# Altium PCB Audio_Amplifier.PcbDoc
Units mm, origin at the board's own origin, x right, y up, seen from the top; angles counter-clockwise.
Board outline 81.9 x 78.4 mm, 2 copper layers (Top Layer, Bottom Layer), stack 1.671 mm thick; 10 components, 10 nets, 31 pads, 0 vias.
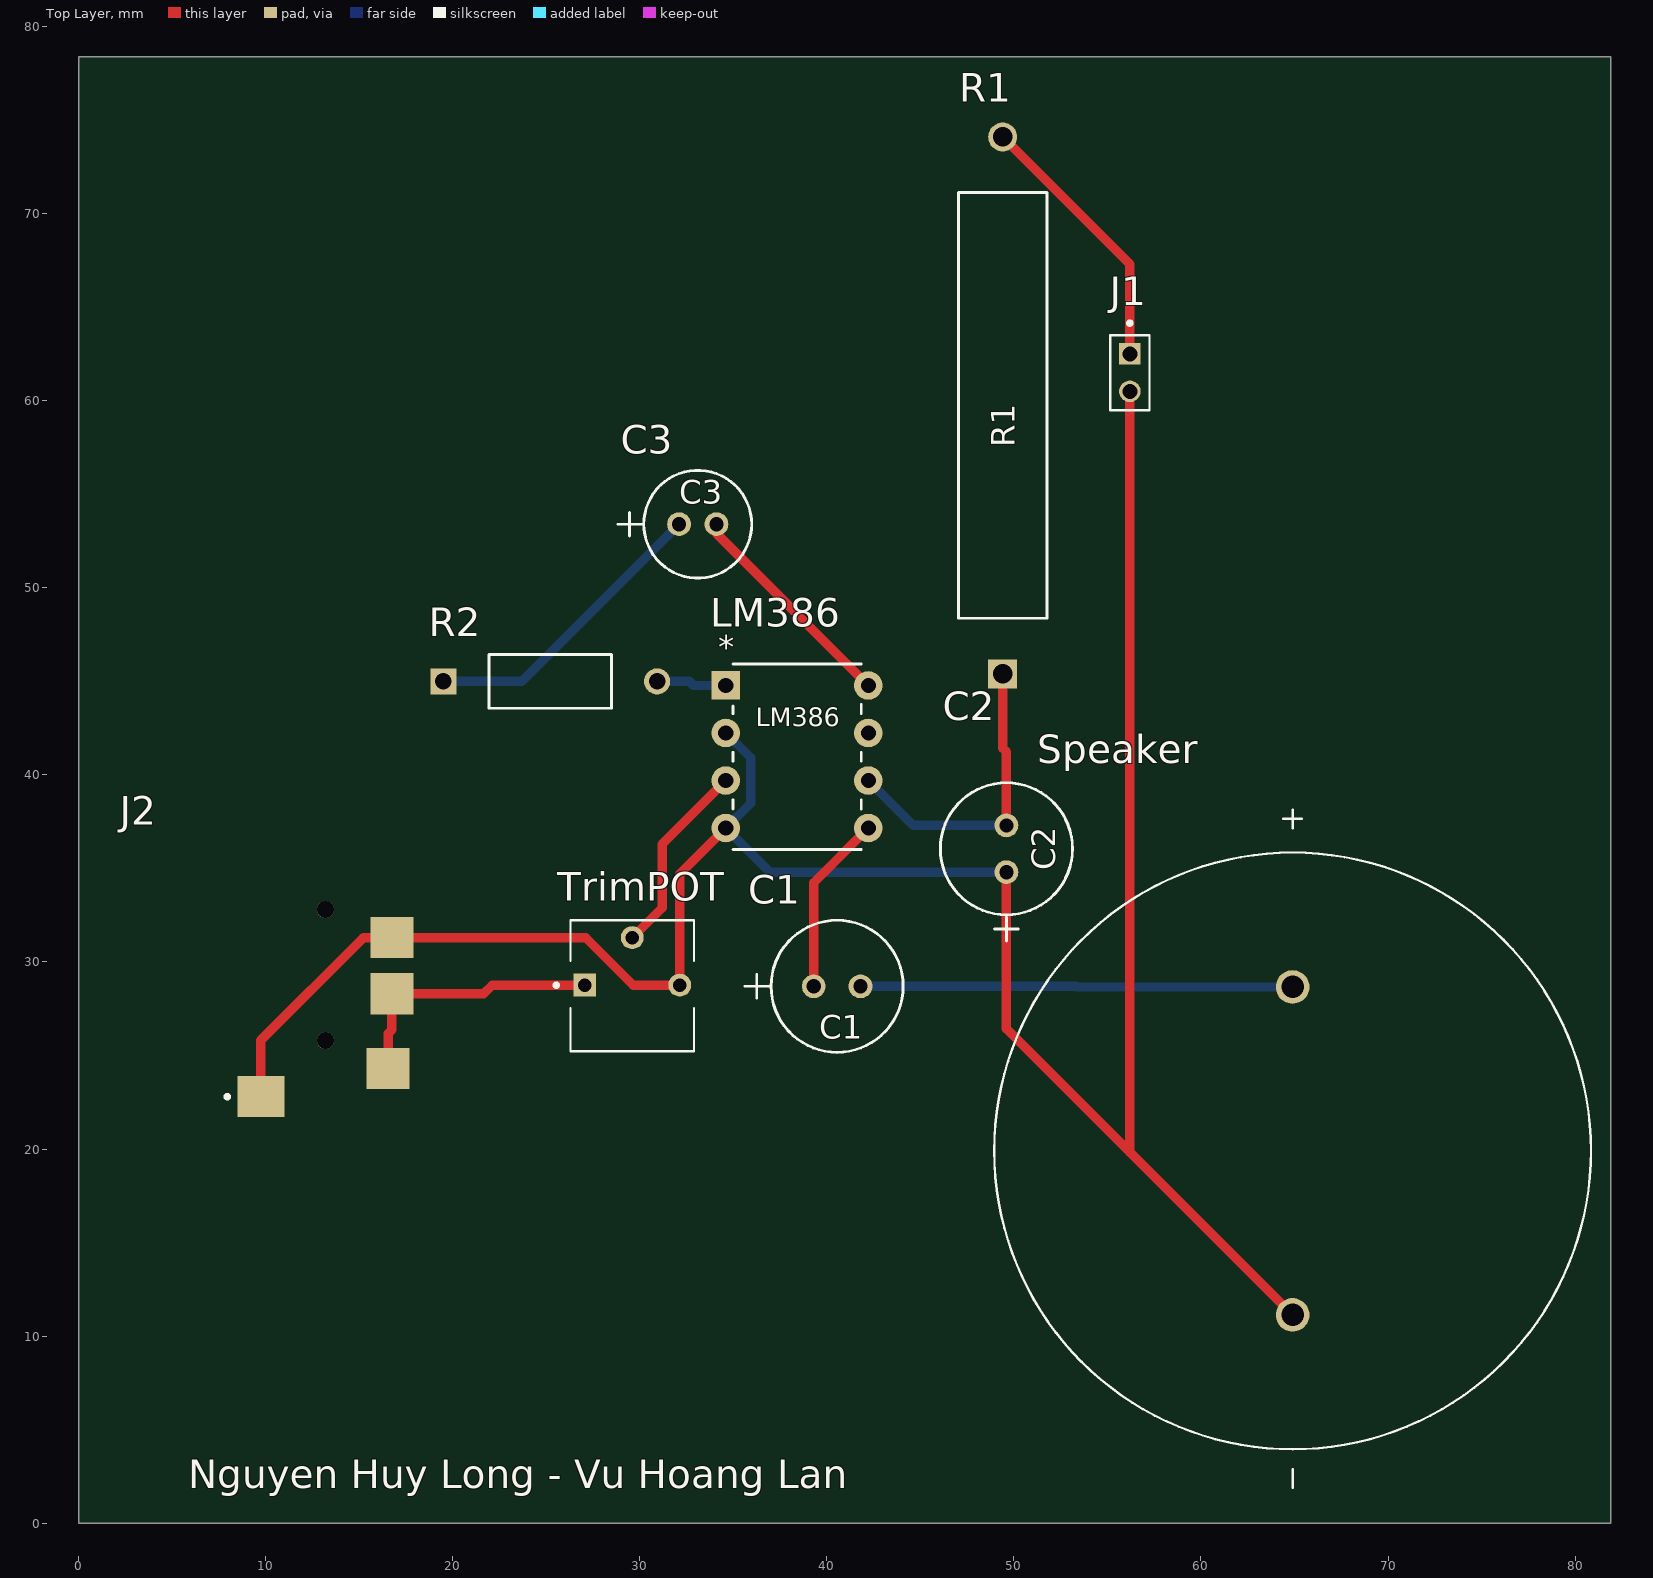
[diagram p0: Top Layer view]
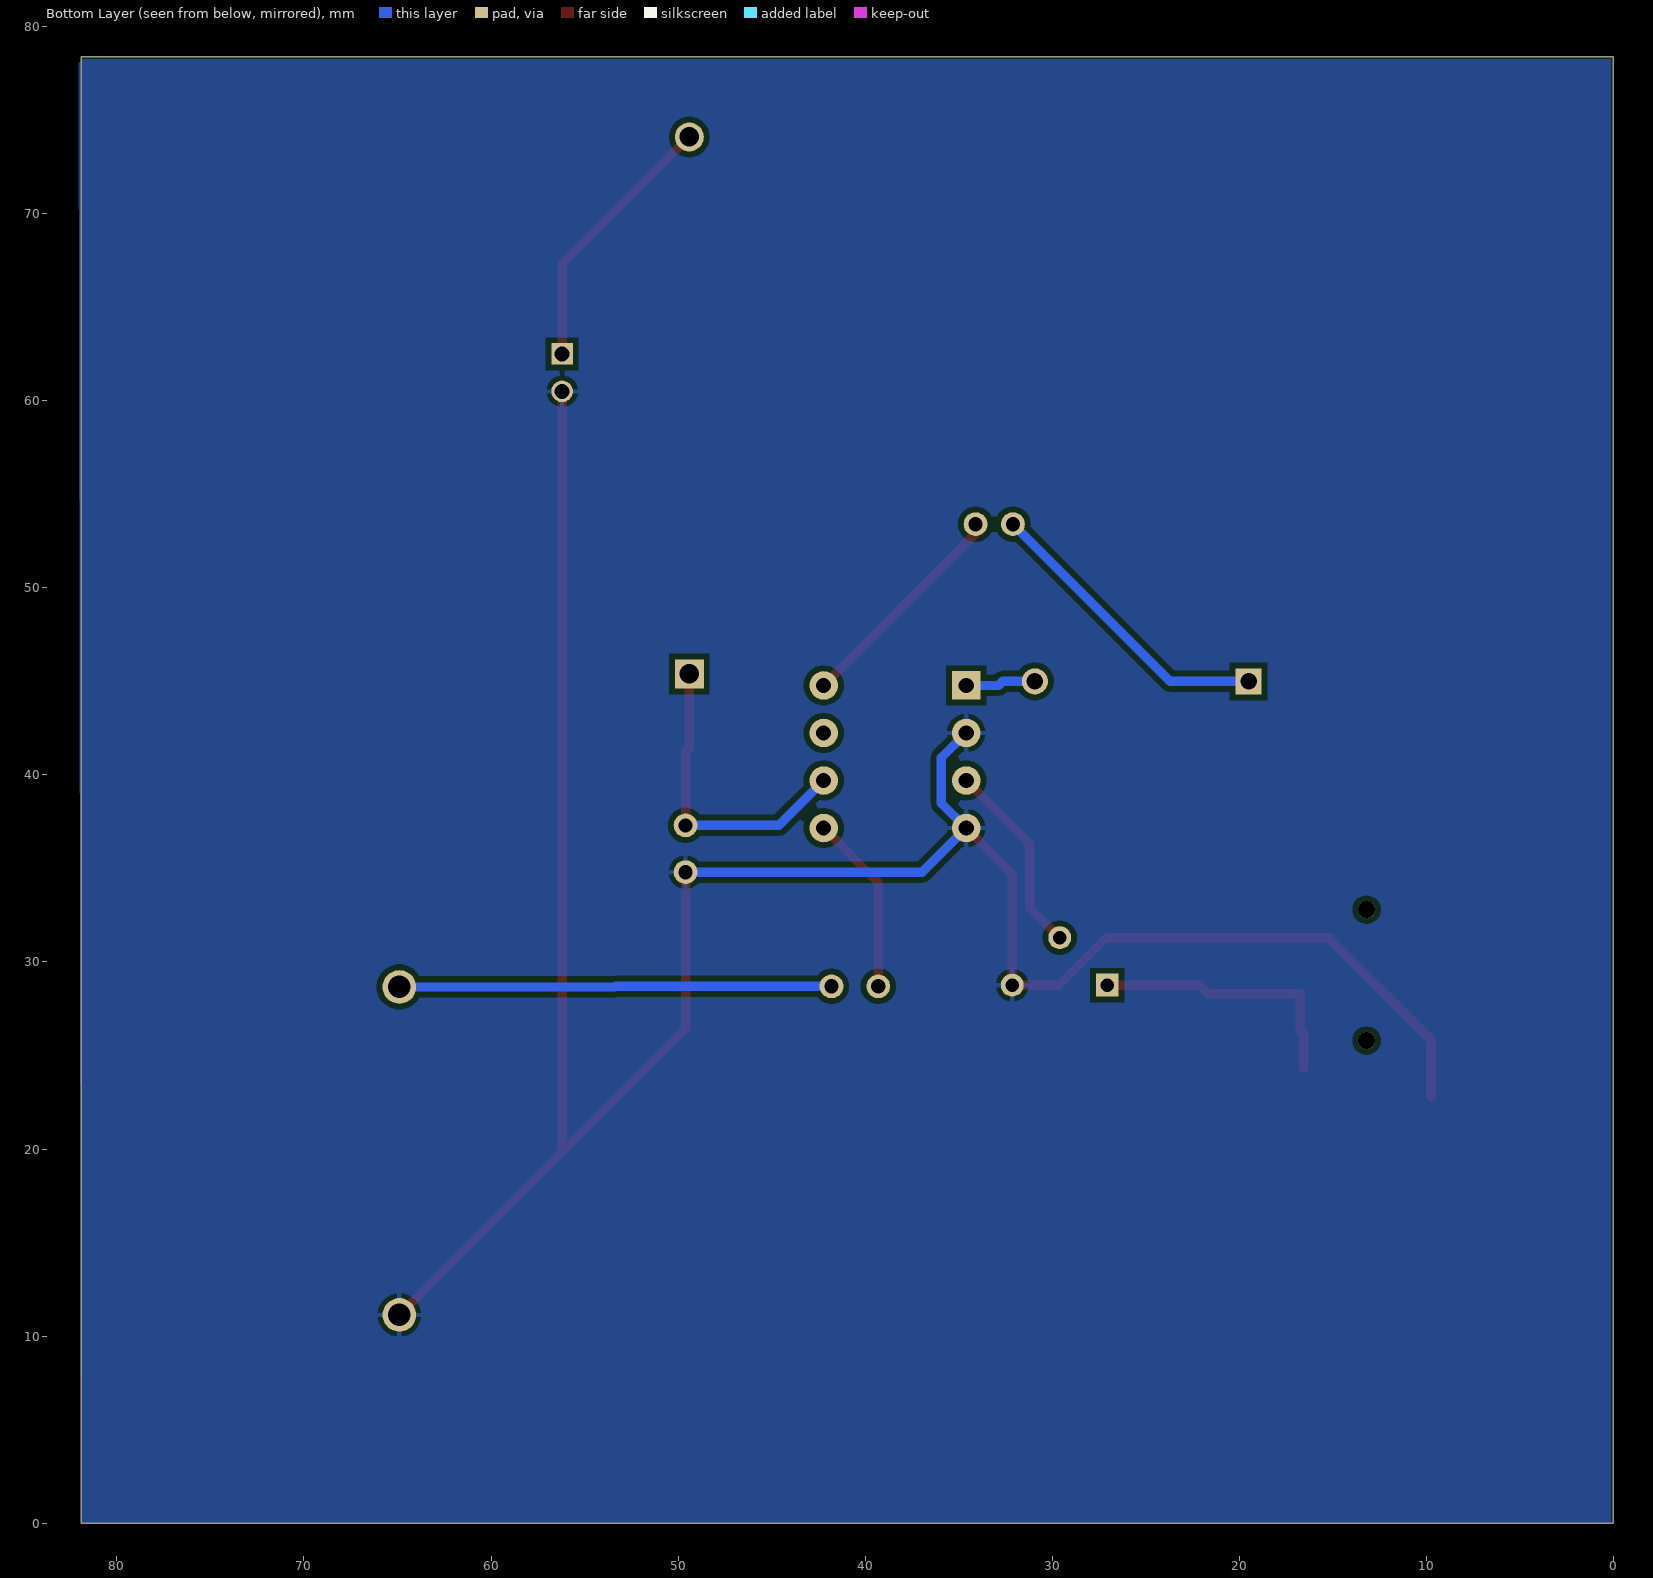
[diagram p1: Bottom Layer view, seen from below]
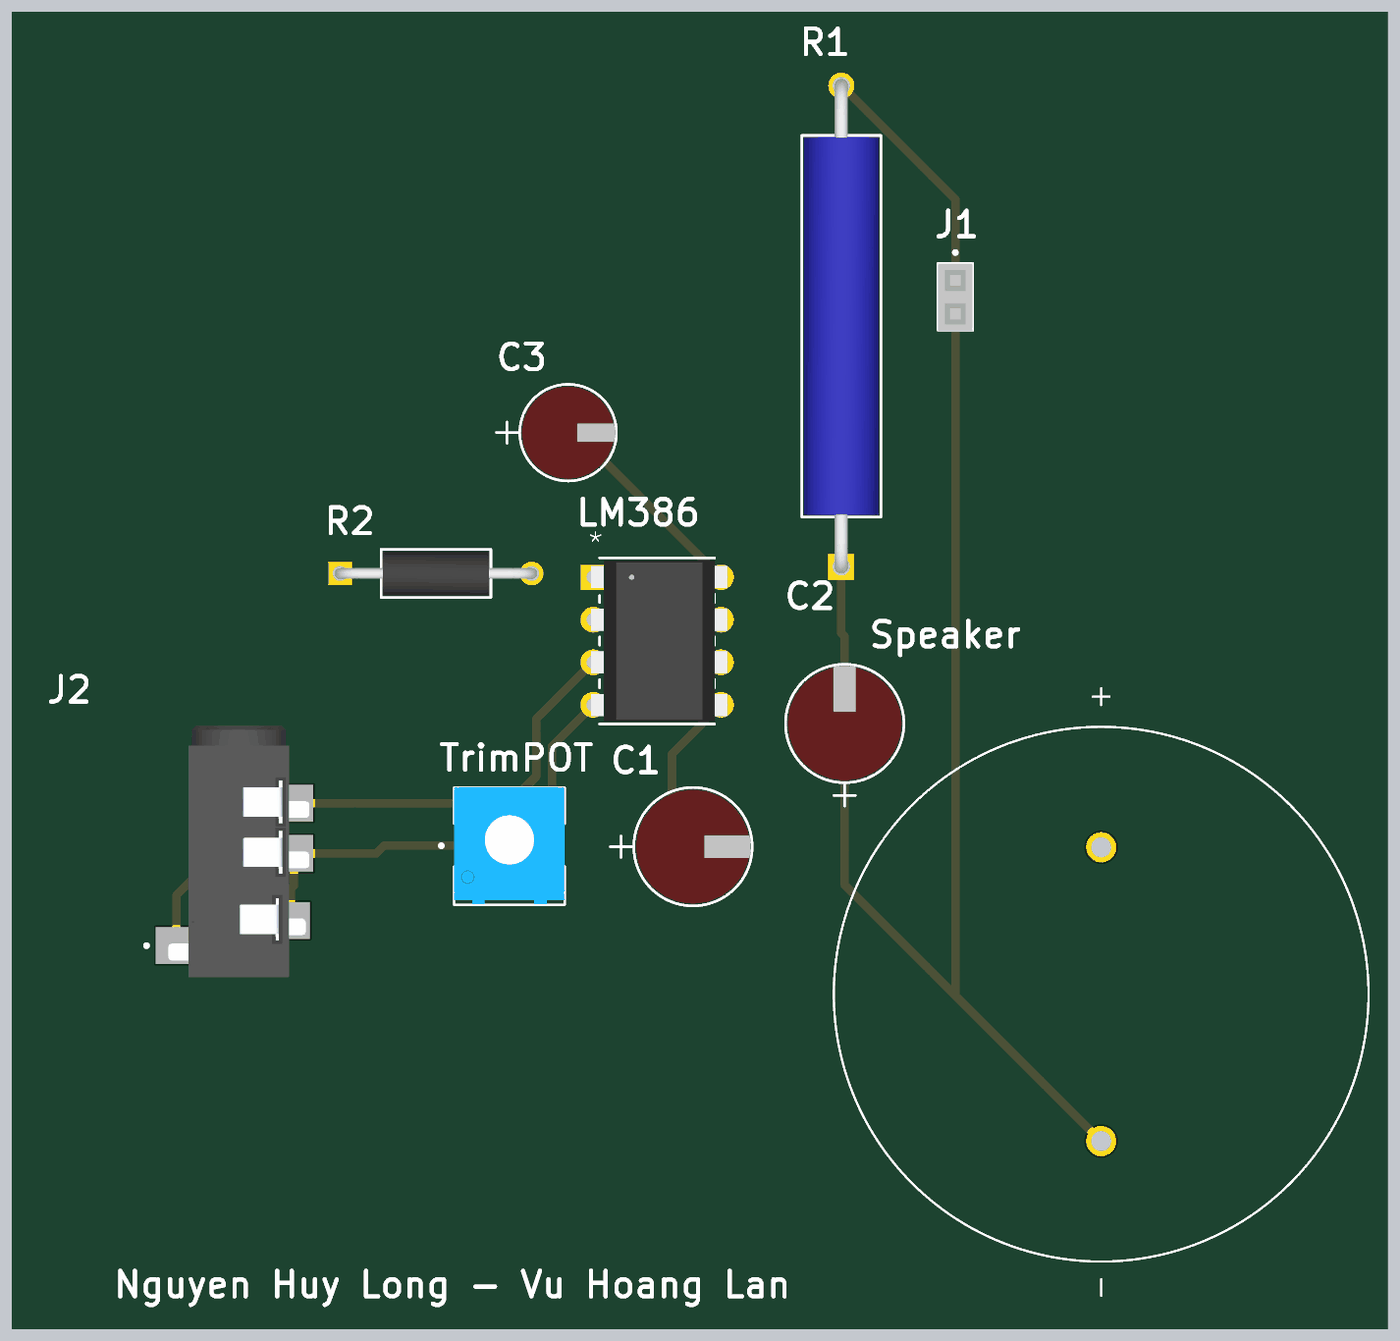
[diagram p2: 3D render of the assembled board from above, using the file's embedded part models]

## Layer stack, top to bottom
Top Solder: solder mask 0.0102, Solder Resist, Dk 3.5
Top Layer: signal copper 0.0356
Dielectric 1: dielectric 1.6, FR-4, Dk 4.8
Bottom Layer: signal copper 0.0356
Bottom Solder: solder mask 0.0102, Solder Resist, Dk 3.5

## Board outline
0,0 81.9,0 81.9,78.4 0,78.4

## Design rules (kind name [scope] priority, off if disabled: settings)
Clearance [All] p1: gap=0.3 ignorepadtopadclearanceinfootprint=FALSE
PolygonConnect [All] p1: connectstyle=Relief reliefconductorwidth=0.254 reliefentries=4 polygonreliefangle="90 Angle" airgapwidth=0.254
RoutingVias [All] p1: holewidth=0.3 width=0.6 viastyle="Through Hole" minholewidth=0.3 minwidth=0.6 maxholewidth=0.3 maxwidth=0.6
SilkToSilkClearance [All] p1: silktosilkclearance=0
SilkToSolderMaskClearance [IsPad] p1: minsilkscreentomaskgap=0.1 clearancetoexposedcopper=TRUE
SolderMaskExpansion [All] p1: expansion=0.102 istentingtop=FALSE
SupplyNets "Schematic Supply Nets_1" [InNet('GND')] p1: voltage=0.000
SupplyNets "Schematic Supply Nets" [InNet('VCC (5-15V)')] p2: voltage=0.000
Width [All] p1: maxlimit=1 minlimit=0.3 preferedwidth=0.5
28 further rules are at their usual default settings.

## Components (designator, comment, footprint, x,y, rotation, side; value= is the part's Value field where it differs from the comment)
C1 "220uF" CAP_YX_6P3X11_RUB 39.3,28.7 r0 top value=220µF
C2 "220uF" CAP_YX_6P3X11_RUB 49.6,34.8 r90 top value=220µF
C3 "10uF" CAP_YX_5X11_RUB 32.1,53.4 r0 top value=10µF
J1 "Power" TE_2314870-2 56.2,62.5 r270 top
J2 "Audio" SAMESKY_SJ2-3574A-SMT-TR 13.2,29.3 r180 top
LM386 "LM386N-4/NOPB" N08E_TEX 34.6,44.78 r0 top
R1 "10" RES_OY_OHM 49.4,45.398 r90 top value=10Ω
R2 "1k" STA_CF14_STP 19.5,45 r0 top value=1kΩ
Speaker "S" SPKR_AST-03208MR-R 64.9,19.9 r270 top
TrimPOT "10k" TRIM_3362P-1-103LF 29.6,28.76 r0 top value=10kΩ

## Footprints (in the part's own frame and the unit in brackets; to place one, negate y for a bottom-side part, rotate by r counter-clockwise, add the part's x,y. Pads: shape width x height; smd on the part's side, far side on the other; paste and mask are expansions set on the pad)
CAP_YX_5X11_RUB [mil]
  round 50 / inner round 60 / far side round 50 hole 30 paste-99999 mask+0: 1(0,0) 2(78.74,0)
  silkscreen extent -129,-113 153,113, body extent -69,-108 149,108, height 493
CAP_YX_6P3X11_RUB [mil]
  round 50 / inner round 60 / far side round 50 hole 30 paste-99999 mask+0: 1(0,0) 2(98.43,0)
  silkscreen extent -145,-139 188,139, body extent -85,-134 184,134, height 493
N08E_TEX [mil]
  rect 60x60 / inner round 60 / far side rect 60x60 hole 32 paste-99999 mask+0: 1(0,0)
  round 60 hole 32 paste-99999 mask+0: 2(0,-100) 3(0,-200) 4(0,-300) 5(300,-300) 6(300,-200) 7(300,-100) 8(300,0)
  silkscreen extent 15,-345 285,45, body extent -5,-340 315,40, height 215
RES_OY_OHM [mil]
  rect 61x61 / inner round 60 / far side rect 61x61 hole 41 paste-99999 mask+0: 1(0,0)
  round 61 / inner round 60 / far side round 61 hole 41 paste-99999 mask+0: 2(1130,0)
  silkscreen extent 117,-93 1013,93, body extent -16,-88 1146,88, height 176
SAMESKY_SJ2-3574A-SMT-TR [mm]
  rect 2.5x2.2 smd: 1(3.45,6.5)
  rect 2.3x2.2 smd: 2(-3.35,5) 3(-3.55,1) 4(-3.55,-2)
  round 0.9 hole 0.9 unplated: ""(0,3.5) ""(0,-3.5)
  silkscreen extent 5.15,6.4 5.35,6.6, body extent -4.45,-6.62 3.95,8.38, height 5.4
SPKR_AST-03208MR-R [mm]
  round 1.8 hole 1.2: N(8.765,0) P(-8.765,0)
  silkscreen extent -18.25,-15.95 18,15.95
STA_CF14_STP [mil]
  rect 55x55 / inner round 60 / far side rect 55x55 hole 35 paste-99999 mask+0: 1(0,0)
  round 55 / inner round 60 / far side round 55 hole 35 paste-99999 mask+0: 2(450,0)
  silkscreen extent 96,-56 354,56, body extent -12,-51 462,51, height 103
TE_2314870-2 [mm]
  rect 1.15x1.15 hole 0.8: 1(0,0)
  round 1.15 hole 0.8: 2(2,0)
  silkscreen extent -1.75,-1.05 3,1.05, body extent -0.98,-1.03 3.02,1.03, height 4.5
TRIM_3362P-1-103LF [mm]
  rect 1.222x1.222 / inner round 1.222 / far side rect 1.222x1.222 hole 0.714: 1(-2.54,0)
  round 1.222 hole 0.714: 2(0,2.54) 3(2.54,0)
  silkscreen extent -4.16,-3.53 3.3,3.47, body extent -3.3,-3.49 3.3,3.49, height 4.88

## Part data
C1 C2: library part 25YXJ220M6.3X11, "CAP ALUM 220UF 20% 25V RADIAL TH", Case/Package=Radial, Leakage Current=55µA, Manufacturer=Rubycon, Max Operating Temperature=105°C, Min Operating Temperature=-40°C, Ripple Current=280mA, Supplier Part Number=1189-2913-ND, Tolerance=20%, Voltage=25V, Category="Aluminum Electrolytic Capacitors", ComponentLink1Description=https://datasheet.octopart.com:443/25YXJ220M6.3X11-Rubycon-datasheet-182101243.pdf?src-supplier=IHS, ComponentLink1URL=https://datasheet.octopart.com:443/25YXJ220M6.3X11-Rubycon-datasheet-182101243.pdf?src-supplier=IHS, ComponentLink2Description=https://datasheet.octopart.com:443/25YXJ220M6.3X11-Rubycon-datasheet-86451563.pdf?src-supplier=Master+Electronics, ComponentLink2URL=https://datasheet.octopart.com:443/25YXJ220M6.3X11-Rubycon-datasheet-86451563.pdf?src-supplier=Master+Electronics, ComponentLink3Description=https://datasheet.octopart.com:443/25YXJ220M6.3X11-Rubycon-datasheet-155906921.pdf?src-supplier=JRH+Electronics, ComponentLink3URL=https://datasheet.octopart.com:443/25YXJ220M6.3X11-Rubycon-datasheet-155906921.pdf?src-supplier=JRH+Electronics, ComponentLink4Description=https://datasheet.octopart.com:443/25YXJ220M6.3X11-Rubycon-datasheet-12363446.pdf?src-supplier=Future+Electronics, ComponentLink4URL=https://datasheet.octopart.com:443/25YXJ220M6.3X11-Rubycon-datasheet-12363446.pdf?src-supplier=Future+Electronics, Diameter=6.3mm, Height=11mm, Height - Seated (Max)=12.4968mm, Impedance=220mΩ, Lead Diameter=500µm, Lead Pitch=2.5mm, Length=11mm, Life (Hours)=7000hours, Lifecycle Status=Production, Manufacturer Part Number=25YXJ220M6.3X11, Mounting Technology="Through Hole", Number of Terminals=2, Packaging=Bulk, Polarity=Polar, Pricing="1=0.3, 10=0.136, 50=0.1348, 100=0.1186, 500=0.09074, 2000=0.07456, 4000=0.06845, 6000=0.06536 (USD)", Radiation Hardening=No, REACH SVHC=Yes, RoHS=Compliant, Stock=49998, Supplier=DigiKey, Terminal Pitch=2.5mm, Termination=Radial, Voltage Rating=25V, Voltage Rating (DC)=25V
C3: library part 50YXJ10M5X11, "CAP ALUM 10UF 20% 50V RADIAL TH", Case/Package=Radial, Leakage Current=5µA, Manufacturer=Rubycon, Max Operating Temperature=105°C, Min Operating Temperature=-40°C, Ripple Current=42mA, Supplier Part Number=1189-2322-ND, Tolerance=20%, Voltage Rating=50V, Category="Aluminum Electrolytic Capacitors", ComponentLink1Description=https://datasheet.octopart.com:443/50YXJ10M5X11-Rubycon-datasheet-182101243.pdf?src-supplier=IHS, ComponentLink1URL=https://datasheet.octopart.com:443/50YXJ10M5X11-Rubycon-datasheet-182101243.pdf?src-supplier=IHS, ComponentLink2Description=https://datasheet.octopart.com:443/50YXJ10M5X11-Rubycon-datasheet-12363446.pdf?src-supplier=Master+Electronics, ComponentLink2URL=https://datasheet.octopart.com:443/50YXJ10M5X11-Rubycon-datasheet-12363446.pdf?src-supplier=Master+Electronics, ComponentLink3Description=https://datasheet.octopart.com:443/50YXJ10M5X11-Rubycon-datasheet-155906921.pdf?src-supplier=JRH+Electronics, ComponentLink3URL=https://datasheet.octopart.com:443/50YXJ10M5X11-Rubycon-datasheet-155906921.pdf?src-supplier=JRH+Electronics, Diameter=5mm, Height=11mm, Height - Seated (Max)=12.4968mm, Impedance=1.5Ω, Lead Free="Lead Free", Lead Pitch=2.0066mm, Length=11mm, Life (Hours)=5000hours, Lifecycle Status=Production, Manufacturer Part Number=50YXJ10M5X11, Mounting Technology="Through Hole", Number of Terminals=2, Packaging=Bulk, Pricing="1=0.29, 10=0.131, 50=0.1296, 100=0.1141, 500=0.08714, 1000=0.07859, 3000=0.0679, 6000=0.06259 (USD)", Radiation Hardening=No, REACH SVHC=Yes, RoHS=Compliant, Stock=46663, Supplier=DigiKey, Terminal Pitch=2mm, Termination=Radial, Voltage Rating (DC)=50V
J1: library part 2314870-2, "2P,2MM,BB,REC,SRVT,2.0,0.76AU,TU", Contact Current Rating=2A, Dielectric Material="Liquid Crystal Polymer", Housing Color=Black, Insulation Resistance=1GΩ, Manufacturer="TE Connectivity / AMP", Max Operating Temperature=125°C, Min Operating Temperature=-40°C, Operating Supply Voltage=125V, Supplier Part Number=17-2314870-2-ND, Category="Card Edge Connectors", China RoHS=Compliant, Circuit Application=Signal, ComponentLink1Description=https://datasheet.octopart.com:443/2314870-2-TE-Connectivity-datasheet-180034179.pdf?src-supplier=IHS, ComponentLink1URL=https://datasheet.octopart.com:443/2314870-2-TE-Connectivity-datasheet-180034179.pdf?src-supplier=IHS, ComponentLink2Description=https://datasheet.octopart.com:443/2314870-2-TE-Connectivity---AMP-datasheet-137291475.pdf?src-supplier=TE+Connectivity, ComponentLink2URL=https://datasheet.octopart.com:443/2314870-2-TE-Connectivity---AMP-datasheet-137291475.pdf?src-supplier=TE+Connectivity, ComponentLink3Description=https://sigma.octopart.com:443/137815737/technical_drawing/TE-Connectivity-2314870-2.pdf?src-supplier=TE+Connectivity, ComponentLink3URL=https://sigma.octopart.com:443/137815737/technical_drawing/TE-Connectivity-2314870-2.pdf?src-supplier=TE+Connectivity, ComponentLink4Description=https://datasheet.octopart.com:443/2314870-2-TE-Connectivity---AMP-datasheet-170291846.pdf?src-supplier=Master+Electronics, ComponentLink4URL=https://datasheet.octopart.com:443/2314870-2-TE-Connectivity---AMP-datasheet-170291846.pdf?src-supplier=Master+Electronics, ComponentLink5Description=https://datasheet.octopart.com:443/2314870-2-TE-Connectivity-datasheet-181565101.pdf?src-supplier=Sager+Electronics, ComponentLink5URL=https://datasheet.octopart.com:443/2314870-2-TE-Connectivity-datasheet-181565101.pdf?src-supplier=Sager+Electronics, Contact Finish Thickness - Mating=760nm, Contact Gender=Female, Contact Style=Socket, Current Rating=2A, Length=4mm, Lifecycle Status=Production, Manufacturer Part Number=2314870-2, Mating Alignment=Without, Number of Contacts=2, Number of Ports=1, Number of Positions=2, Number of Rows=1, Orientation=Vertical, PCB Mount Alignment=Without, PCB Mount Retention=Without, PCB Thickness=1.6mm, Pins=2, Plating Thickness=759.99848nm, Pricing="1=0.72, 10=0.609, 110=0.51427, 550=0.45902, 1100=0.4371, 5060=0.39248, 10010=0.37405 (USD)", REACH SVHC=Yes, RoHS=Compliant, Shielding=No, Stock=11381, Supplier=DigiKey, Terminal Pitch=2mm, Width=2mm
J2: library part SJ2-3574A-SMT-TR, "AUDIO JACK, 3.5 MM, RT, 4 CONDUC", Current Rating=1A, Manufacturer=CUI, Temperature="-25°C to +85°C", Temperature Range High=+85°C, Temperature Range Low=-25°C, Voltage Rating=12V, Automotive=No, Category=Conn, ComponentLink2Description=Datasheet, ComponentLink2URL=https://www.cui.com/product/resource/sj2-357x-smt.pdf, Conn Orientation=Horizontal, Contact Material=Silver, Device Class L1=Connectors, Device Class L2="Audio / Video Connectors", Device Class L3=unset, Digikey Description="AUDIO JACK, 3.5 MM, RT, 4 CONDUC", Height=5.3mm, Lead Free=Yes, Manufacturer Part Number=SJ2-3574A-SMT-TR, Number of Contacts=4, Octopart=https://octopart.com/sj2-3574a-smt-tr-cui-77838840, Package=SJ2-3574A-SMT-TR, RoHS=TRUE
LM386: "IC AMP CLASS AB MONO 1W 8DIP", Case/Package=PDIP, Input Bias Current=250nA, Manufacturer="Texas Instruments", Manufacturer Lifecycle Status=ACTIVE, Max Operating Temperature=70°C, Max Output Power=1W, Max Power Dissipation=1.25W, Max Supply Voltage=18V, Min Operating Temperature=0°C, Min Supply Voltage=5V, Nominal Supply Current=4mA, Operating Supply Voltage=12V, Power Supply Rejection Ratio (PSRR)=50dB, Supplier Part Number=296-43960-5-ND, Voltage Gain=46dB, Bandwidth=300kHz, Category="Amplifiers - Audio", ComponentLink1Description=https://octopart.com:443/opatz8j6/c1?t=jiPaMZP2rnyQg5DzUUspGXJ1H81nn_meodlJxaU5rnmp5Nz2ANkFOJjw4AMPM17dABOurUYLs7Oiea1cG9Dp3V3kRsJ43gYboc5MRNM_wXx_hdbyhUPu1cwRkgSQnbMDrTSRuBGe7vuZ52zUPxv4RYMfxCTIfcL-Gs1LHG8EJfKQca_ABSS6-7HJh27p74ambnRZQ_xhmEf-5hRXq6kXlRxXTde8jlB9apxAIESCEWDl4004FjcawcWp2VDcw49HMZT9NKZB0TSbyNArSrQo-COYzUjjGeFKa-94cvLja9jANuMpPI5KLd_4xSjywMOucovxXtGr6NT1M1bIYcylWYcDOz6hqSDLVAehd2HyIxJaoHqn7yOvszgqGYrjaQdrIEmJ&src-supplier=Texas+Instruments, ComponentLink1URL=https://octopart.com:443/opatz8j6/c1?t=jiPaMZP2rnyQg5DzUUspGXJ1H81nn_meodlJxaU5rnmp5Nz2ANkFOJjw4AMPM17dABOurUYLs7Oiea1cG9Dp3V3kRsJ43gYboc5MRNM_wXx_hdbyhUPu1cwRkgSQnbMDrTSRuBGe7vuZ52zUPxv4RYMfxCTIfcL-Gs1LHG8EJfKQca_ABSS6-7HJh27p74ambnRZQ_xhmEf-5hRXq6kXlRxXTde8jlB9apxAIESCEWDl4004FjcawcWp2VDcw49HMZT9NKZB0TSbyNArSrQo-COYzUjjGeFKa-94cvLja9jANuMpPI5KLd_4xSjywMOucovxXtGr6NT1M1bIYcylWYcDOz6hqSDLVAehd2HyIxJaoHqn7yOvszgqGYrjaQdrIEmJ&src-supplier=Texas+Instruments, ComponentLink2Description=https://sigma.octopart.com:443/49250158/technical_drawing/Texas-Instruments-LM386N-4-NOPB.pdf?src-supplier=Texas+Instruments, ComponentLink2URL=https://sigma.octopart.com:443/49250158/technical_drawing/Texas-Instruments-LM386N-4-NOPB.pdf?src-supplier=Texas+Instruments, ComponentLink3Description=https://datasheet.octopart.com:443/LM386N-4-NOPB-Texas-Instruments-datasheet-94062099.pdf?src-supplier=Upverter, ComponentLink3URL=https://datasheet.octopart.com:443/LM386N-4-NOPB-Texas-Instruments-datasheet-94062099.pdf?src-supplier=Upverter, ComponentLink4Description=https://datasheet.octopart.com:443/LM386N-4/NOPB-Texas-Instruments-datasheet-10848518.pdf?src-supplier=element14, ComponentLink4URL=https://datasheet.octopart.com:443/LM386N-4/NOPB-Texas-Instruments-datasheet-10848518.pdf?src-supplier=element14, ComponentLink5Description=https://datasheet.octopart.com:443/LM386N-4/NOPB-National-Semiconductor-datasheet-11093.pdf?src-supplier=element14, ComponentLink5URL=https://datasheet.octopart.com:443/LM386N-4/NOPB-National-Semiconductor-datasheet-11093.pdf?src-supplier=element14, ComponentLink6Description=https://datasheet.octopart.com:443/LM386N-4-NOPB-Texas-Instruments-datasheet-164415079.pdf?src-supplier=SHENGYU+ELECTRONICS, ComponentLink6URL=https://datasheet.octopart.com:443/LM386N-4-NOPB-Texas-Instruments-datasheet-164415079.pdf?src-supplier=SHENGYU+ELECTRONICS, ComponentLink7Description=https://datasheet.octopart.com:443/LM386N-4-NOPB-Texas-Instruments-datasheet-159115206.pdf?src-supplier=LCSC, ComponentLink7URL=https://datasheet.octopart.com:443/LM386N-4-NOPB-Texas-Instruments-datasheet-159115206.pdf?src-supplier=LCSC, ComponentLink8Description=https://datasheet.octopart.com:443/LM386N-4/NOPB-National-Semiconductor-datasheet-9929271.pdf?src-supplier=RS+(Formerly+Allied+Electronics), ComponentLink8URL=https://datasheet.octopart.com:443/LM386N-4/NOPB-National-Semiconductor-datasheet-9929271.pdf?src-supplier=RS+(Formerly+Allied+Electronics), ComponentLink9Description=https://datasheet.octopart.com:443/LM386N-4-NOPB-Texas-Instruments-datasheet-8817787.pdf?src-supplier=Jameco, ComponentLink9URL=https://datasheet.octopart.com:443/LM386N-4-NOPB-Texas-Instruments-datasheet-8817787.pdf?src-supplier=Jameco, ComponentLink10Description=http://sigma.octopart.com:80/conflict_mineral_statement/Texas-Instruments-company-63.pdf?src-supplier=Compliance+Statements, ComponentLink10URL=http://sigma.octopart.com:80/conflict_mineral_statement/Texas-Instruments-company-63.pdf?src-supplier=Compliance+Statements, ComponentLink11Description=http://sigma.octopart.com:80/reach_statement/Texas-Instruments-company-64.pdf?src-supplier=Compliance+Statements, ComponentLink11URL=http://sigma.octopart.com:80/reach_statement/Texas-Instruments-company-64.pdf?src-supplier=Compliance+Statements, Contact Plating=Tin, Gain=20dB, Height=5.08mm, Lead Free="Lead Free", Length=9.81mm, Lifecycle Status=Production, Load Impedance=8Ω, Manufacturer Part Number=LM386N-4/NOPB, Number of Channels=1, Output Power=1W, Pins=8, Power Dissipation=1.25W, Pricing="1=1.05, 10=0.757, 40=0.6525, 120=0.59425, 280=0.56014, 520=0.53985, 1000=0.52192, 2520=0.5016, 5000=0.48959 (USD)", Quiescent Current=4mA, Radiation Hardening=No, REACH SVHC=No, RoHS=Compliant, Schedule B="8542330000, 8542330000|8542330000|8542330000|8542330000|8542330000", Stock=3854, Supplier=DigiKey, Supply Type=Single, Thickness=3.9mm, Weight=4.535924g, Width=6.35mm
R1: library part OY100KE, "RES 10 OHM 10% 2W AXIAL", Case/Package=Axial, Manufacturer=Ohmite, Max Operating Temperature=220°C, Max Power Dissipation=2W, Min Operating Temperature=-40°C, Supplier Part Number=OY100KE-ND, Temperature Coefficient=1600ppm/°C, Tolerance=10%, Voltage Rating=400V, Category="Through-Hole Resistors", ComponentLink1Description=https://datasheet.octopart.com:443/OY100KE-Ohmite-datasheet-10289479.pdf?src-supplier=Master+Electronics, ComponentLink1URL=https://datasheet.octopart.com:443/OY100KE-Ohmite-datasheet-10289479.pdf?src-supplier=Master+Electronics, ComponentLink2Description=https://datasheet.octopart.com:443/OY100KE-Ohmite-datasheet-118803.pdf?src-supplier=Newark, ComponentLink2URL=https://datasheet.octopart.com:443/OY100KE-Ohmite-datasheet-118803.pdf?src-supplier=Newark, ComponentLink3Description=https://datasheet.octopart.com:443/OY100KE-Ohmite-datasheet-8757895.pdf?src-supplier=Newark, ComponentLink3URL=https://datasheet.octopart.com:443/OY100KE-Ohmite-datasheet-8757895.pdf?src-supplier=Newark, ComponentLink4Description=https://datasheet.octopart.com:443/OY100KE-Ohmite-datasheet-8449861.pdf?src-supplier=Newark, ComponentLink4URL=https://datasheet.octopart.com:443/OY100KE-Ohmite-datasheet-8449861.pdf?src-supplier=Newark, ComponentLink5Description=https://datasheet.octopart.com:443/OY100KE-Ohmite-datasheet-65987458.pdf?src-supplier=Electro+Sonic, ComponentLink5URL=https://datasheet.octopart.com:443/OY100KE-Ohmite-datasheet-65987458.pdf?src-supplier=Electro+Sonic, ComponentLink6Description=https://datasheet.octopart.com:443/OY100KE-Ohmite-datasheet-156071680.pdf?src-supplier=Electro+Sonic, ComponentLink6URL=https://datasheet.octopart.com:443/OY100KE-Ohmite-datasheet-156071680.pdf?src-supplier=Electro+Sonic, ComponentLink7Description=https://datasheet.octopart.com:443/OY100KE-Ohmite-datasheet-27849301.pdf?src-supplier=Electro+Sonic, ComponentLink7URL=https://datasheet.octopart.com:443/OY100KE-Ohmite-datasheet-27849301.pdf?src-supplier=Electro+Sonic, ComponentLink8Description=https://datasheet.octopart.com:443/OY100KE-Ohmite-datasheet-37140018.pdf?src-supplier=Farnell, ComponentLink8URL=https://datasheet.octopart.com:443/OY100KE-Ohmite-datasheet-37140018.pdf?src-supplier=Farnell, ComponentLink9Description=https://datasheet.octopart.com:443/OY100KE-Ohmite-datasheet-3744.pdf?src-supplier=RS+(Formerly+Allied+Electronics), ComponentLink9URL=https://datasheet.octopart.com:443/OY100KE-Ohmite-datasheet-3744.pdf?src-supplier=RS+(Formerly+Allied+Electronics), Composition=Ceramic, Diameter=7mm, Features="Moisture Resistant", Lead Diameter=800µm, Lead Free="Lead Free", Lead Length=38mm, Length=18.9992mm, Lifecycle Status=Production, Manufacturer Part Number=OY100KE, Material=Ceramic, Mounting Technology="Through Hole", Number of Terminals=2, Number of Terminations=2, Packaging=Bulk, Pins=2, Power Dissipation=2W, Power Rating=2W, Pricing="1=3.32, 10=2.226, 25=1.9292, 50=1.7438, 100=1.5859, 250=1.41308, 500=1.30492, 1000=1.21304, 5000=1.04961 (USD)", REACH SVHC=Yes, RoHS=Compliant, Stock=6509, Supplier=DigiKey, Termination=Axial, Voltage Rating (AC)=400V, Voltage Rating (DC)=400V, Wire/Cable Diameter=787.4µm, Working Voltage=400V
R2: library part CF14JT1K00, "RES 1K OHM 5% 1/4W AXIAL", Case/Package=Axial, Manufacturer="Stackpole Electronics", Max Operating Temperature=155°C, Max Power Dissipation=250mW, Min Operating Temperature=-55°C, Supplier Part Number=CF14JT1K00CT-ND, Temperature Coefficient=-400ppm/°C, Tolerance=5%, Working Voltage=350V, Category="Through-Hole Resistors", China RoHS=Compliant, ComponentLink1Description=https://datasheet.octopart.com:443/CF14JT1K00-Stackpole-Electronics-datasheet-170576565.pdf?src-supplier=IHS, ComponentLink1URL=https://datasheet.octopart.com:443/CF14JT1K00-Stackpole-Electronics-datasheet-170576565.pdf?src-supplier=IHS, ComponentLink2Description=https://datasheet.octopart.com:443/CF14JT1K00-Stackpole-Electronics-datasheet-32780772.pdf?src-supplier=Electro+Sonic, ComponentLink2URL=https://datasheet.octopart.com:443/CF14JT1K00-Stackpole-Electronics-datasheet-32780772.pdf?src-supplier=Electro+Sonic, ComponentLink3Description=https://datasheet.octopart.com:443/CF14JT1K00-Stackpole-Electronics-datasheet-141193785.pdf?src-supplier=Upverter, ComponentLink3URL=https://datasheet.octopart.com:443/CF14JT1K00-Stackpole-Electronics-datasheet-141193785.pdf?src-supplier=Upverter, ComponentLink4Description=https://datasheet.octopart.com:443/CF14JT1K00-Stackpole-Electronics-datasheet-12509918.pdf?src-supplier=Stackpole+Electronics, ComponentLink4URL=https://datasheet.octopart.com:443/CF14JT1K00-Stackpole-Electronics-datasheet-12509918.pdf?src-supplier=Stackpole+Electronics, ComponentLink5Description=https://datasheet.octopart.com:443/CF14JT1K00-Stackpole-Electronics-datasheet-10790057.pdf?src-supplier=Stackpole+Electronics, ComponentLink5URL=https://datasheet.octopart.com:443/CF14JT1K00-Stackpole-Electronics-datasheet-10790057.pdf?src-supplier=Stackpole+Electronics, ComponentLink6Description=https://datasheet.octopart.com:443/CF14JT1K00-Stackpole-Electronics-datasheet-8360004.pdf?src-supplier=Future+Electronics, ComponentLink6URL=https://datasheet.octopart.com:443/CF14JT1K00-Stackpole-Electronics-datasheet-8360004.pdf?src-supplier=Future+Electronics, ComponentLink7Description=https://datasheet.octopart.com:443/CF14JT1K00-Stackpole-Electronics-datasheet-5314120.pdf?src-supplier=Future+Electronics, ComponentLink7URL=https://datasheet.octopart.com:443/CF14JT1K00-Stackpole-Electronics-datasheet-5314120.pdf?src-supplier=Future+Electronics, ComponentLink8Description=https://datasheet.octopart.com:443/CF14JT1K00-Stackpole-Electronics-datasheet-8325406.pdf?src-supplier=Future+Electronics, ComponentLink8URL=https://datasheet.octopart.com:443/CF14JT1K00-Stackpole-Electronics-datasheet-8325406.pdf?src-supplier=Future+Electronics, ComponentLink9Description=https://datasheet.octopart.com:443/CF14JT1K00-Stackpole-Electronics-datasheet-502449.pdf?src-supplier=Future+Electronics, ComponentLink9URL=https://datasheet.octopart.com:443/CF14JT1K00-Stackpole-Electronics-datasheet-502449.pdf?src-supplier=Future+Electronics, ComponentLink10Description=https://datasheet.octopart.com:443/CF14JT1K00-Stackpole-Electronics-datasheet-11550139.pdf?src-supplier=Arrow+Electronics, ComponentLink10URL=https://datasheet.octopart.com:443/CF14JT1K00-Stackpole-Electronics-datasheet-11550139.pdf?src-supplier=Arrow+Electronics, ComponentLink11Description=https://datasheet.octopart.com:443/CF14JT1K00-Stackpole-Electronics-datasheet-11549048.pdf?src-supplier=Arrow+Electronics, ComponentLink11URL=https://datasheet.octopart.com:443/CF14JT1K00-Stackpole-Electronics-datasheet-11549048.pdf?src-supplier=Arrow+Electronics, ComponentLink12Description=http://sigma.octopart.com:80/15940385/materials_sheet/Stackpole-Electronics-CF14JT1K00.pdf?src-supplier=Compliance+Statements, ComponentLink12URL=http://sigma.octopart.com:80/15940385/materials_sheet/Stackpole-Electronics-CF14JT1K00.pdf?src-supplier=Compliance+Statements, ComponentLink13Description=http://sigma.octopart.com:80/141158212/rohs_statement/Stackpole-Electronics-CF14JT1K00.pdf?src-supplier=Compliance+Statements, ComponentLink13URL=http://sigma.octopart.com:80/141158212/rohs_statement/Stackpole-Electronics-CF14JT1K00.pdf?src-supplier=Compliance+Statements, ComponentLink14Description=http://sigma.octopart.com:80/141158211/reach_statement/Stackpole-Electronics-CF14JT1K00.pdf?src-supplier=Compliance+Statements, ComponentLink14URL=http://sigma.octopart.com:80/141158211/reach_statement/Stackpole-Electronics-CF14JT1K00.pdf?src-supplier=Compliance+Statements, Composition="Carbon Film", Contact Plating=Tin, Diameter=2.3mm, Features="Flame Retardant Coating", Lead Diameter=550µm, Lead Free="Lead Free", Lead Length=28mm, Length=6.5mm, Lifecycle Status=Production, Manufacturer Part Number=CF14JT1K00, Military Standard=Not, Mounting Technology="Axial, Through Hole", Number of Terminals=2, Number of Terminations=2, Packaging="Tape & Reel (TR)", Power Dissipation=250mW, Power Rating=250mW, Pricing="1=0.1, 10=0.026, 25=0.022, 50=0.0192, 100=0.0169, 250=0.01424, 500=0.0126, 1000=0.0112 (USD)", Radiation Hardening=No, REACH SVHC=Yes, RoHS=Compliant, Schedule B="8533100070, 8533100070|8533100070|8533100070|8533100070|8533100070", Stock=403693, Supplier=DigiKey, Termination=Axial
Speaker: library part AST-03208MR-R, "SPEAKER 8OHM 100MW TOP PORT 82DB", Frequency=20kHz, Manufacturer="PUI Audio", Max Operating Temperature=60°C, Max Power Dissipation=200mW, Min Operating Temperature=-20°C, Power Rating=100mW, Self Resonant Frequency=1.5kHz, Supplier Part Number=668-1139-ND, Category=Speakers, ComponentLink1Description=https://datasheet.octopart.com:443/AST-03208MR-R-PUI-Audio-datasheet-10519845.pdf?src-supplier=element14+APAC, ComponentLink1URL=https://datasheet.octopart.com:443/AST-03208MR-R-PUI-Audio-datasheet-10519845.pdf?src-supplier=element14+APAC, ComponentLink2Description=https://datasheet.octopart.com:443/AST-03208MR-R-PUI-Audio-datasheet-8776228.pdf?src-supplier=element14+APAC, ComponentLink2URL=https://datasheet.octopart.com:443/AST-03208MR-R-PUI-Audio-datasheet-8776228.pdf?src-supplier=element14+APAC, ComponentLink3Description=https://datasheet.octopart.com:443/AST-03208MR-R-Projects-Unlimited-datasheet-7562446.pdf?src-supplier=element14, ComponentLink3URL=https://datasheet.octopart.com:443/AST-03208MR-R-Projects-Unlimited-datasheet-7562446.pdf?src-supplier=element14, ComponentLink4Description=https://datasheet.octopart.com:443/AST-03208MR-R-PUI-Audio-datasheet-154249236.pdf?src-supplier=Sager+Electronics, ComponentLink4URL=https://datasheet.octopart.com:443/AST-03208MR-R-PUI-Audio-datasheet-154249236.pdf?src-supplier=Sager+Electronics, ComponentLink5Description=https://datasheet.octopart.com:443/AST-03208MR-R-Projects-Unlimited-datasheet-15957.pdf?src-supplier=Newark, ComponentLink5URL=https://datasheet.octopart.com:443/AST-03208MR-R-Projects-Unlimited-datasheet-15957.pdf?src-supplier=Newark, Depth=15.1mm, Diameter=31.9mm, Height=15.1mm, Impedance=8Ω, Lead Free="Lead Free", Manufacturer Part Number=AST-03208MR-R, Mounting Technology="Through Hole", Packaging=Bulk, Pricing="1=3.07, 10=2.414, 25=2.1984, 50=2.0502, 100=1.9135, 250=1.74888, 500=1.6354, 1000=1.53058, 5000=1.525 (USD)", REACH SVHC=Yes, RoHS=Compliant, Shape=Round, Stock=447, Supplier=DigiKey, Termination="PC Pins"
TrimPOT: library part 3362P-1-103LF, "TRIMMER 10K OHM 0.5W PC PIN TOP", Case Code (Imperial)=0612, Case Code (Metric)=1632, Case/Package=Radial, Color=Blue, Insulation Resistance=1GΩ, Manufacturer=Bourns, Max Operating Temperature=125°C, Max Power Dissipation=500mW, Min Operating Temperature=-55°C, Power Rating=1W, Supplier Part Number=3362P-103LF-ND, Temperature Coefficient=100ppm/°C, Tolerance=10%, Voltage Rating=220mV, Voltage Rating (AC)=300V, Category="Variable Resistors and Potentiometers", ComponentLink1Description=https://datasheet.octopart.com:443/3362P-1-103LF-Bourns-datasheet-182141429.pdf?src-supplier=IHS, ComponentLink1URL=https://datasheet.octopart.com:443/3362P-1-103LF-Bourns-datasheet-182141429.pdf?src-supplier=IHS, ComponentLink2Description=https://datasheet.octopart.com:443/3362P-1-103LF-Bourns-datasheet-134530169.pdf?src-supplier=Upverter, ComponentLink2URL=https://datasheet.octopart.com:443/3362P-1-103LF-Bourns-datasheet-134530169.pdf?src-supplier=Upverter, ComponentLink3Description=https://datasheet.octopart.com:443/3362P-1-103LF-Bourns-datasheet-8815966.pdf?src-supplier=Electro+Sonic, ComponentLink3URL=https://datasheet.octopart.com:443/3362P-1-103LF-Bourns-datasheet-8815966.pdf?src-supplier=Electro+Sonic, ComponentLink4Description=https://datasheet.octopart.com:443/3362P-1-103LF-Bourns-datasheet-154729579.pdf?src-supplier=Electro+Sonic, ComponentLink4URL=https://datasheet.octopart.com:443/3362P-1-103LF-Bourns-datasheet-154729579.pdf?src-supplier=Electro+Sonic, ComponentLink5Description=https://datasheet.octopart.com:443/3362P-1-103LF-Bourns-datasheet-67878644.pdf?src-supplier=Newark, ComponentLink5URL=https://datasheet.octopart.com:443/3362P-1-103LF-Bourns-datasheet-67878644.pdf?src-supplier=Newark, ComponentLink6Description=https://datasheet.octopart.com:443/3362P-1-103LF-Bourns-datasheet-5314783.pdf?src-supplier=Factory+Futures, ComponentLink6URL=https://datasheet.octopart.com:443/3362P-1-103LF-Bourns-datasheet-5314783.pdf?src-supplier=Factory+Futures, ComponentLink7Description=https://datasheet.octopart.com:443/3362P-1-103LF-Bourns-datasheet-8765802.pdf?src-supplier=Factory+Futures, ComponentLink7URL=https://datasheet.octopart.com:443/3362P-1-103LF-Bourns-datasheet-8765802.pdf?src-supplier=Factory+Futures, ComponentLink8Description=https://datasheet.octopart.com:443/3362P-1-103LF-Bourns-datasheet-25360172.pdf?src-supplier=RS+(Formerly+Allied+Electronics), ComponentLink8URL=https://datasheet.octopart.com:443/3362P-1-103LF-Bourns-datasheet-25360172.pdf?src-supplier=RS+(Formerly+Allied+Electronics), ComponentLink9Description=https://datasheet.octopart.com:443/3362P-1-103LF-Bourns-datasheet-1143.pdf?src-supplier=RS+(Formerly+Allied+Electronics), ComponentLink9URL=https://datasheet.octopart.com:443/3362P-1-103LF-Bourns-datasheet-1143.pdf?src-supplier=RS+(Formerly+Allied+Electronics), ComponentLink10Description=https://datasheet.octopart.com:443/3362P-1-103LF-Bourns-datasheet-10270.pdf?src-supplier=RS+(Formerly+Allied+Electronics), ComponentLink10URL=https://datasheet.octopart.com:443/3362P-1-103LF-Bourns-datasheet-10270.pdf?src-supplier=RS+(Formerly+Allied+Electronics), ComponentLink11Description=https://datasheet.octopart.com:443/3362P-1-103LF-Bourns-datasheet-21196235.pdf?src-supplier=Burklin+Elektronik, ComponentLink11URL=https://datasheet.octopart.com:443/3362P-1-103LF-Bourns-datasheet-21196235.pdf?src-supplier=Burklin+Elektronik, ComponentLink12Description=https://datasheet.octopart.com:443/3362P-1-103LF-Bourns-datasheet-177039047.pdf?src-supplier=Burklin+Elektronik, ComponentLink12URL=https://datasheet.octopart.com:443/3362P-1-103LF-Bourns-datasheet-177039047.pdf?src-supplier=Burklin+Elektronik, ComponentLink13Description=https://datasheet.octopart.com:443/3362P-1-103LF-Bourns-datasheet-16887701.pdf?src-supplier=Farnell, ComponentLink13URL=https://datasheet.octopart.com:443/3362P-1-103LF-Bourns-datasheet-16887701.pdf?src-supplier=Farnell, ComponentLink14Description=https://datasheet.octopart.com:443/3362P-1-103LF-Bourns-datasheet-14175342.pdf?src-supplier=iiiC, ComponentLink14URL=https://datasheet.octopart.com:443/3362P-1-103LF-Bourns-datasheet-14175342.pdf?src-supplier=iiiC, ComponentLink15Description=https://datasheet.octopart.com:443/3362P-1-103LF-Bourns-datasheet-8361975.pdf?src-supplier=Verical, ComponentLink15URL=https://datasheet.octopart.com:443/3362P-1-103LF-Bourns-datasheet-8361975.pdf?src-supplier=Verical, ComponentLink16Description=https://datasheet.octopart.com:443/3362P-1-103LF-Bourns-datasheet-7621470.pdf?src-supplier=Jameco, ComponentLink16URL=https://datasheet.octopart.com:443/3362P-1-103LF-Bourns-datasheet-7621470.pdf?src-supplier=Jameco, ComponentLink17Description=http://sigma.octopart.com:80/conflict_mineral_statement/Bourns-company-36.pdf?src-supplier=Compliance+Statements, ComponentLink17URL=http://sigma.octopart.com:80/conflict_mineral_statement/Bourns-company-36.pdf?src-supplier=Compliance+Statements, Composition=Cermet, Contact Plating=Tin, Depth=6.99mm, Height=4.88mm, Lead Diameter=460µm, Lead Free="Lead Free", Lead Length=5.46mm, Length=3.2mm, Lifecycle Status=Production, Manufacturer Part Number=3362P-1-103LF, Military Standard=Not, Mounting Technology="Surface Mount", Number of Terminals=3, Number of Turns=1, Packaging="Tape and Reel", Pins=3, Pitch=2.54mm, Power Dissipation=500mW, Pricing="1=0.91, 10=0.765, 25=0.714, 50=0.6778, 100=0.6432, 250=0.5998, 500=0.56882, 1000=0.53931, 5000=0.47625 (USD)", Radiation Hardening=No, REACH SVHC=Yes, RoHS=Compliant, Schedule B="8533400080, 8533400080|8533400080|8533400080|8533400080|8533400080", Stock=10636, Supplier=DigiKey, Taper=Linear, Termination=Pin, Type=Potentiometer, Voltage Rating (DC)=300V, Weight=566.990462mg, Width=6.6mm, Working Voltage=300V

## Nets (pads, with @x,y where several pads share a name; then routed paths per layer and width w, separated by ;. In a path a pad name is that pad's centre, name@x,y a point inside that pad or via, vN(x,y) a via of type N, cw(c..) or ccw(c..) an arc to the next point about the centre after c; other vN are vias at no path point)
GND: C2.1 J1.2 J2.1 J2.4 LM386.2 LM386.4 Speaker.N TrimPOT.3 | length 131
  Top Layer w0.5: J2.1 9.75,25.822 15.228,31.3 J2.4 27.109,31.3 29.649,28.76 TrimPOT.3 32.14,34.7 LM386.4 ; C2.1 49.6,26.435 56.2,19.835 ; J1.2 56.2,19.835 ; Speaker.N 56.2,19.835
  Bottom Layer w0.5: LM386.2 35.929,40.911 35.929,38.489 LM386.4 36.96,34.8 C2.1
NetC1_1: C1.1 LM386.5 | length 9.7
  Top Layer w0.5: C1.1 39.3,34.24 LM386.5
NetC1_2: C1.2 Speaker.P | length 23.1
  Bottom Layer w0.5: C1.2 53.329,28.7 53.364,28.665 Speaker.P
NetC2_2: C2.2 LM386.6 R1.1 | length 16.6
  Top Layer w0.5: R1.1 49.4,41.424 49.6,41.224 C2.2
  Bottom Layer w0.5: LM386.6 44.62,37.3 C2.2
NetC3_1: C3.1 R2.1 | length 16.1
  Bottom Layer w0.5: R2.1 23.7,45 C3.1
NetC3_2: C3.2 LM386.8 | length 12
  Top Layer w0.5: C3.2 34.1,52.9 LM386.8
NetJ2_2: J2.2 J2.3 TrimPOT.1 | length 14.6
  Top Layer w0.5: J2.2 16.55,26.178 16.75,26.378 J2.3 21.65,28.3 22.11,28.76 TrimPOT.1
NetLM386_1: LM386.1 R2.2 | length 3.8
  Bottom Layer w0.5: R2.2 32.654,45 32.874,44.78 LM386.1
NetLM386_3: LM386.3 TrimPOT.2 | length 10.5
  Top Layer w0.5: TrimPOT.2 31.199,32.899 31.199,36.299 LM386.3
"VCC (5-15V)": J1.1 R1.2 | length 14.4
  Top Layer w0.5: R1.2 56.2,67.3 J1.1
pads on no net: J2. LM386.7

## Polygon pours and split planes (outlines as drawn)
GND on Bottom Layer "GND_L02_P001" (solid, pour order 1): 82.05,78.25 81.9,0 0.15,0 0.15,-0.15 0.15,78.25

## Silkscreen, mask and mechanical layers (free items; w line width, h text height)
Top Overlay:
  text "Nguyen Huy Long - Vu Hoang Lan" at 5.854,1.862 h1.52
Board:
  the board outline again, w0.2

## Text inside footprints (layer, text, board x,y; h text height)
J2: Mechanical 13 "PCB EDGE" at 9.95,34.8 h1.02 r180
LM386: Top Overlay "*" at 34.2,46.2 h1.27; Mechanical 13 "*" at 35.045,44.145 h1.27
R1: Mechanical 13 "RefDes2" at 50.035,57.527 h1.27 r90